# EAGLE board daughterboard (EAGLE 4.13)
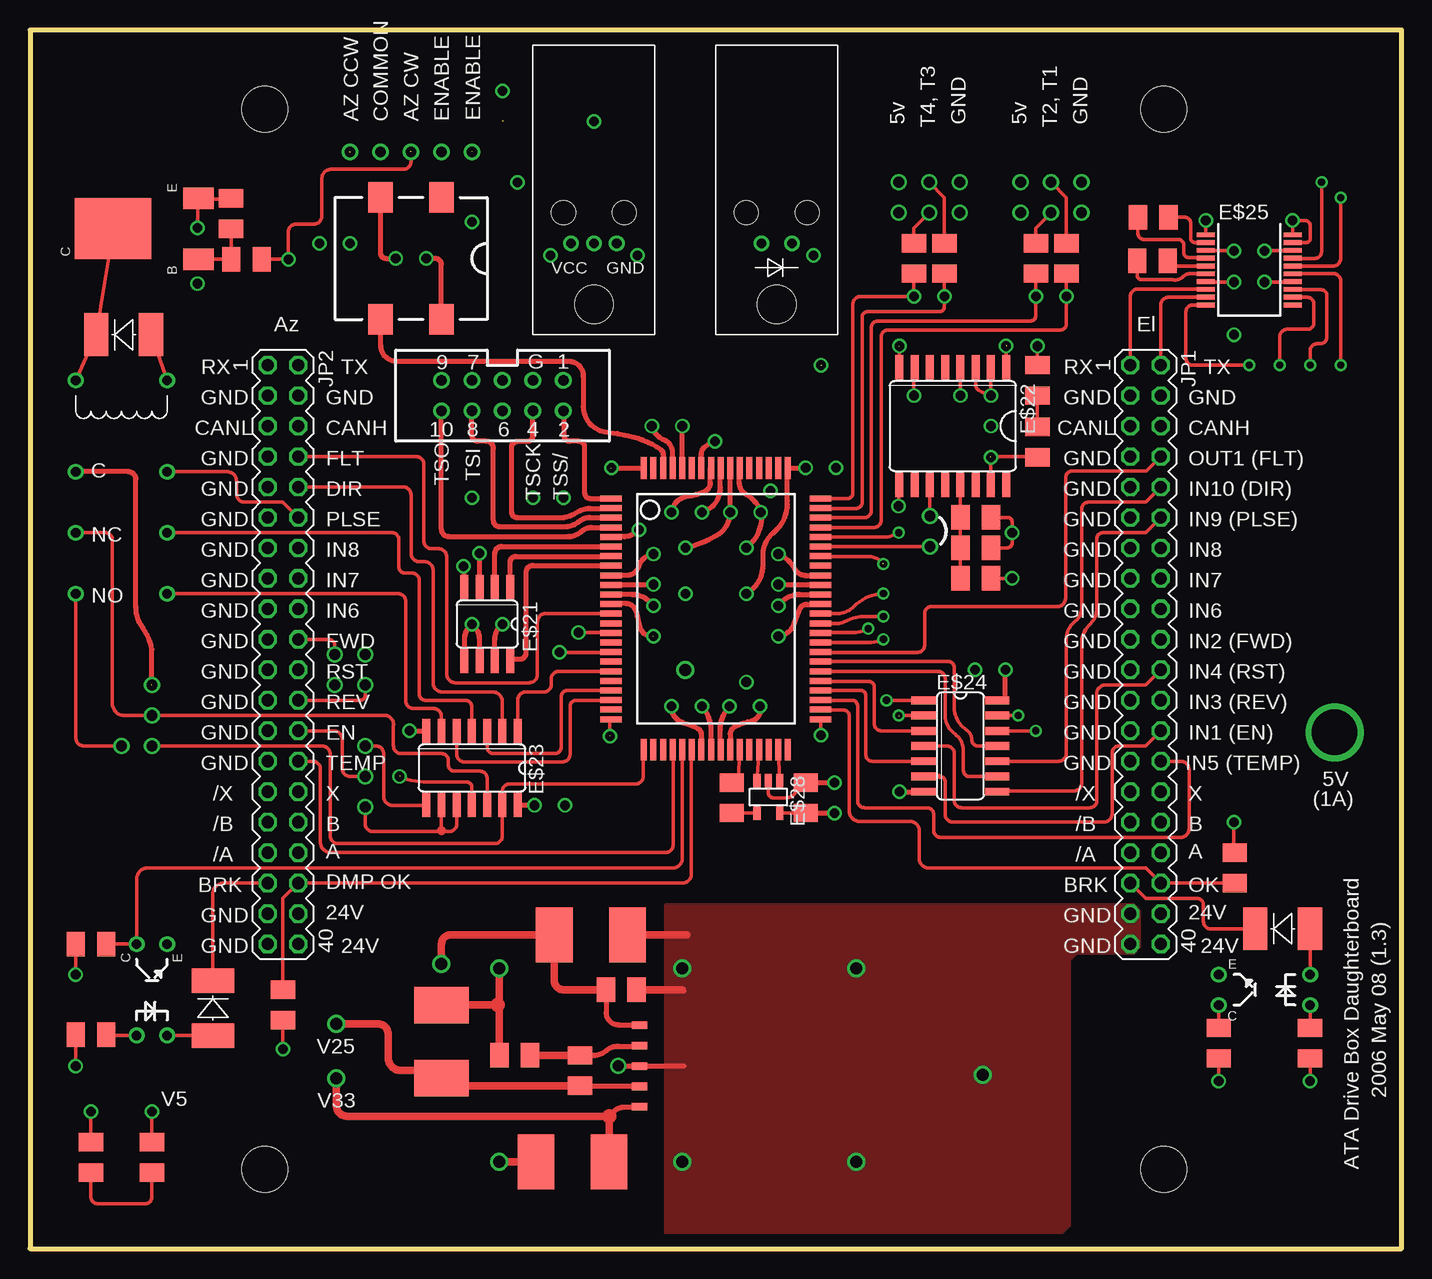
[diagram p0: board, top side]
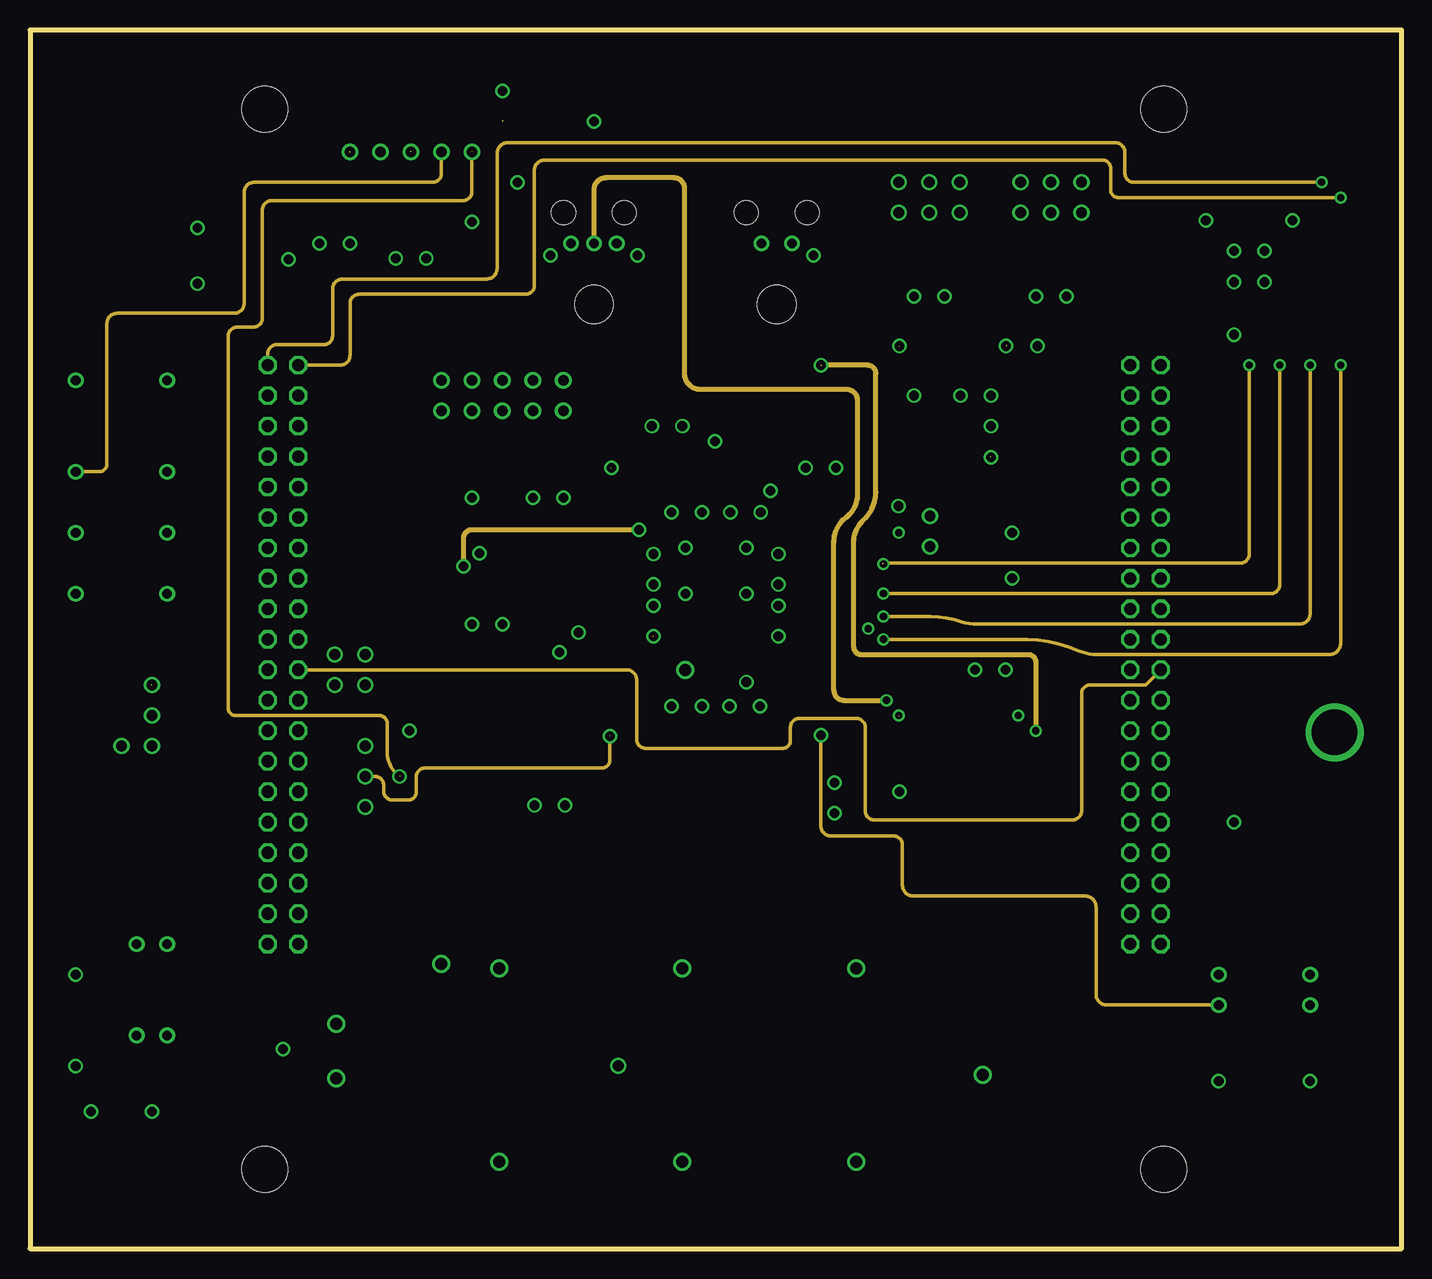
[diagram p1: board, inner layer Route2]
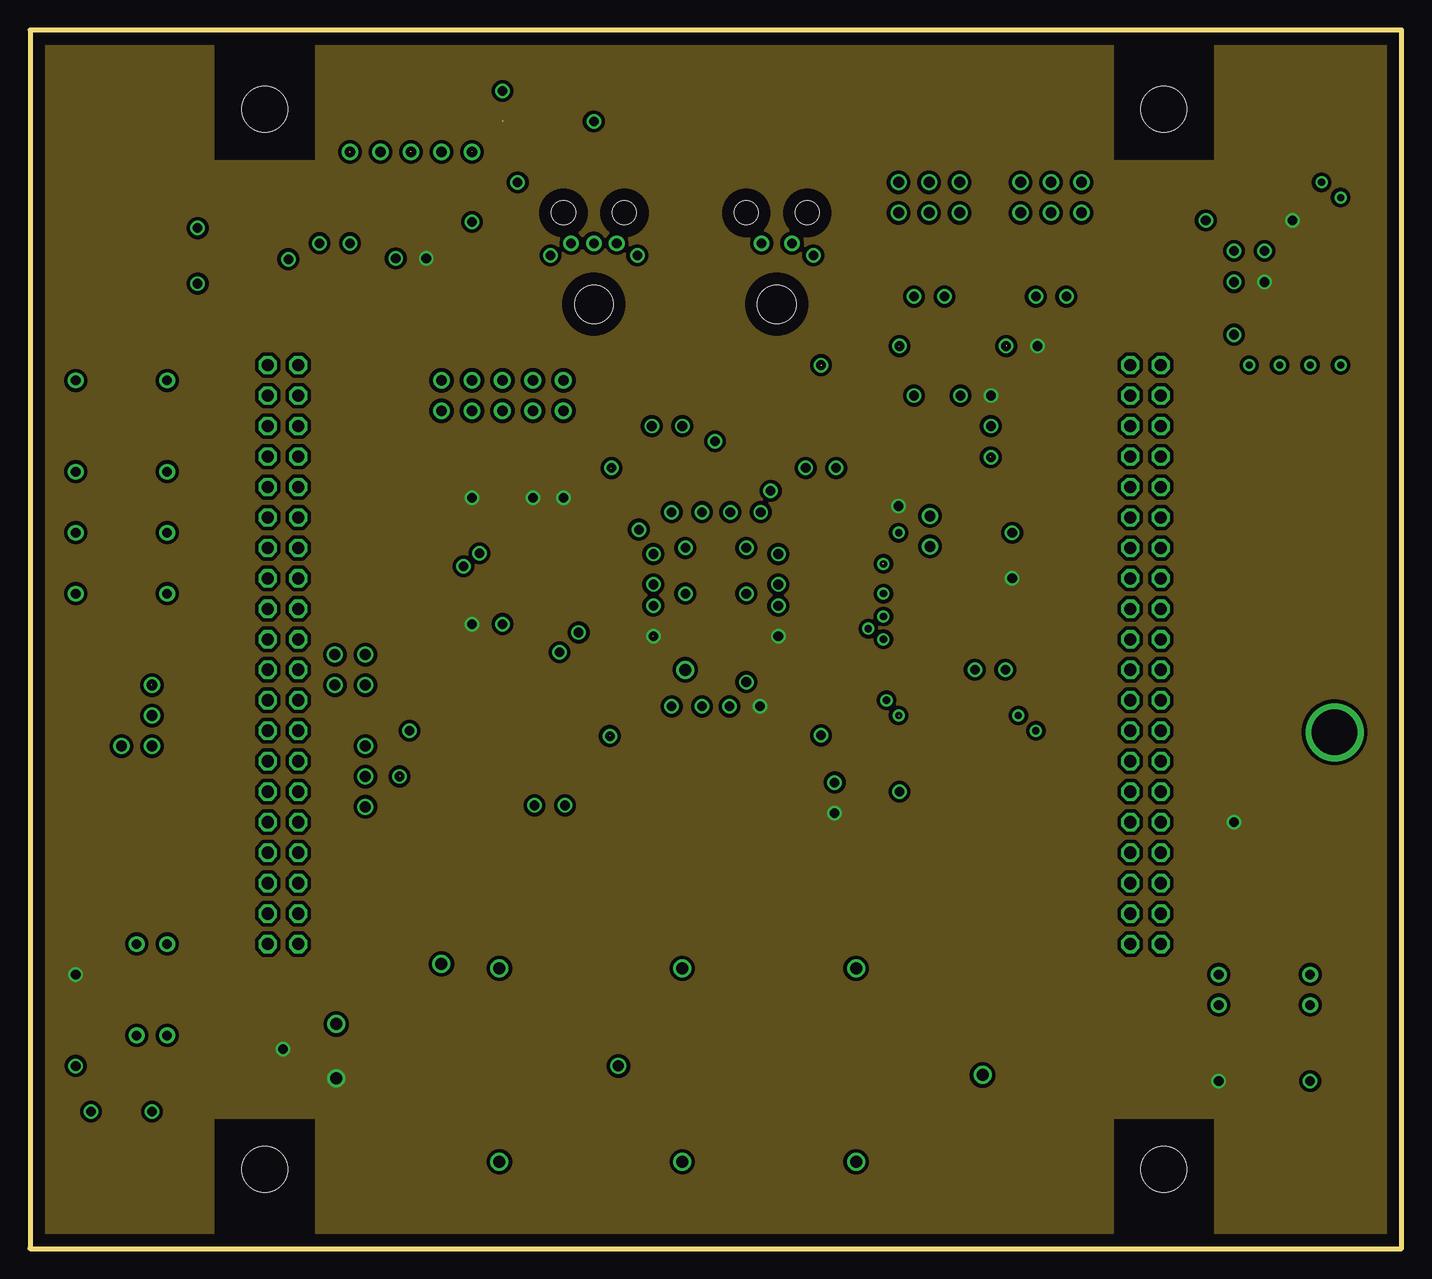
[diagram p2: board, inner layer Route3]
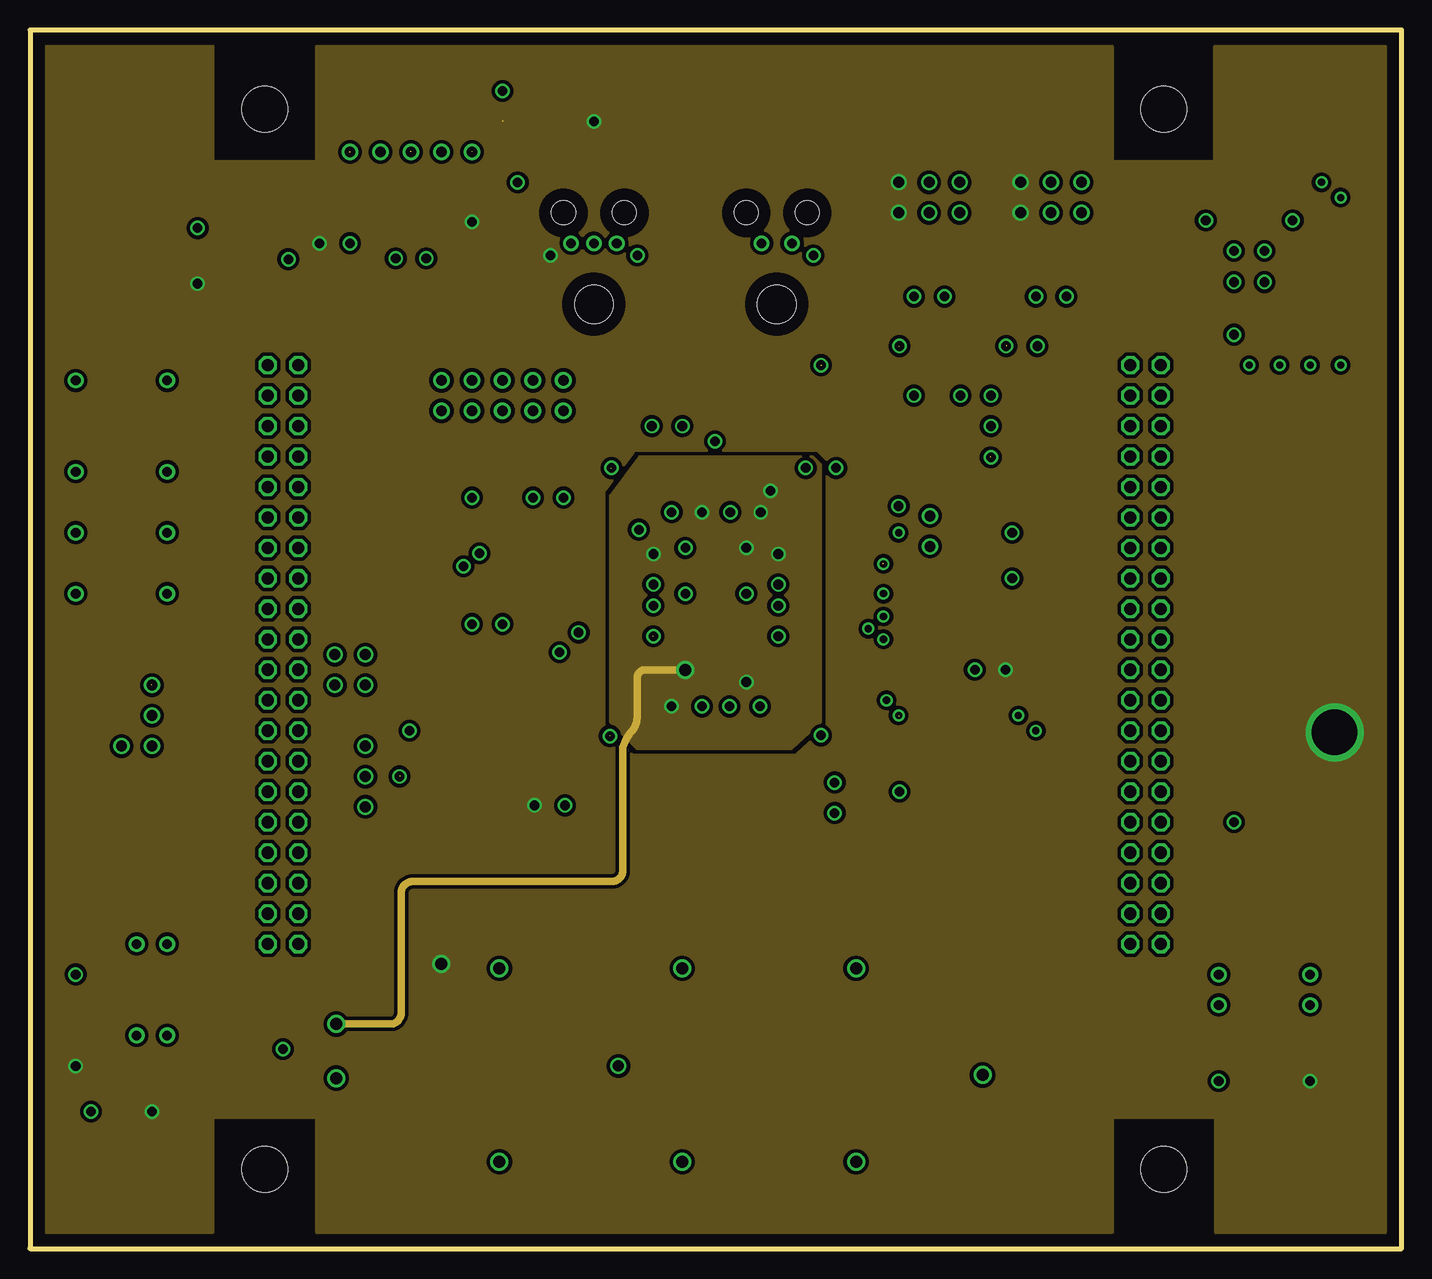
[diagram p3: board, inner layer Route14]
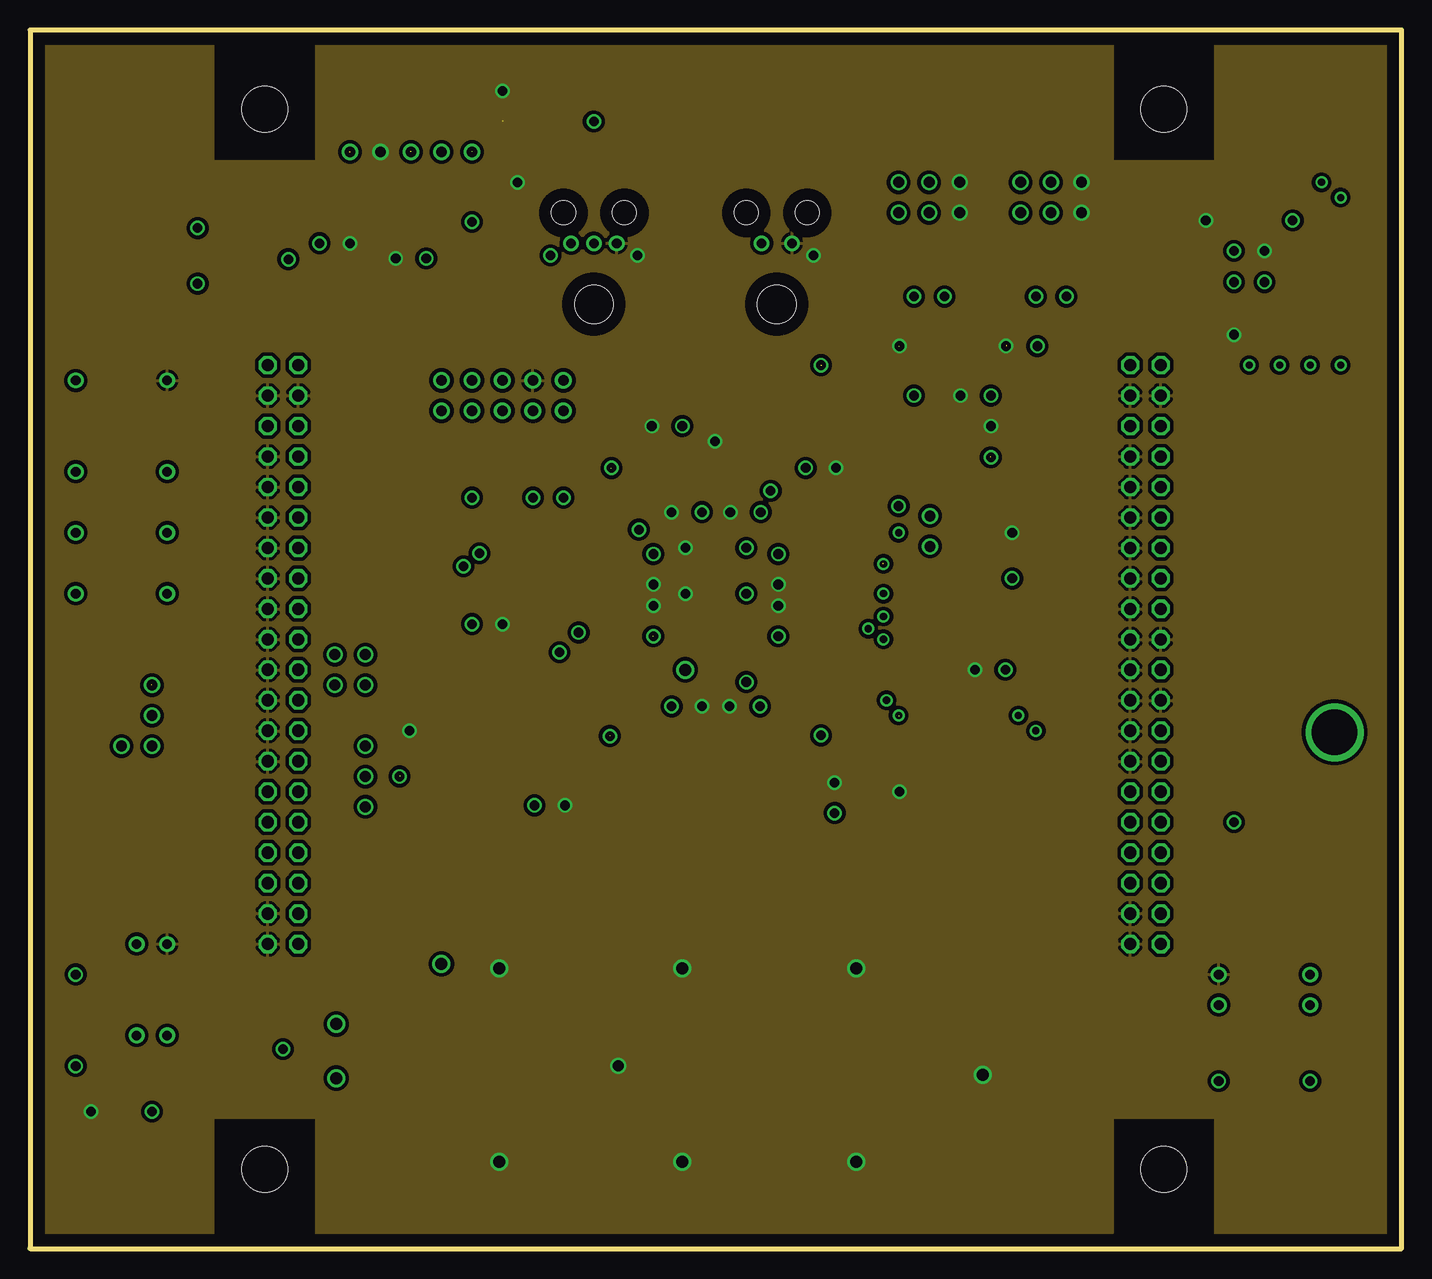
[diagram p4: board, inner layer Route15]
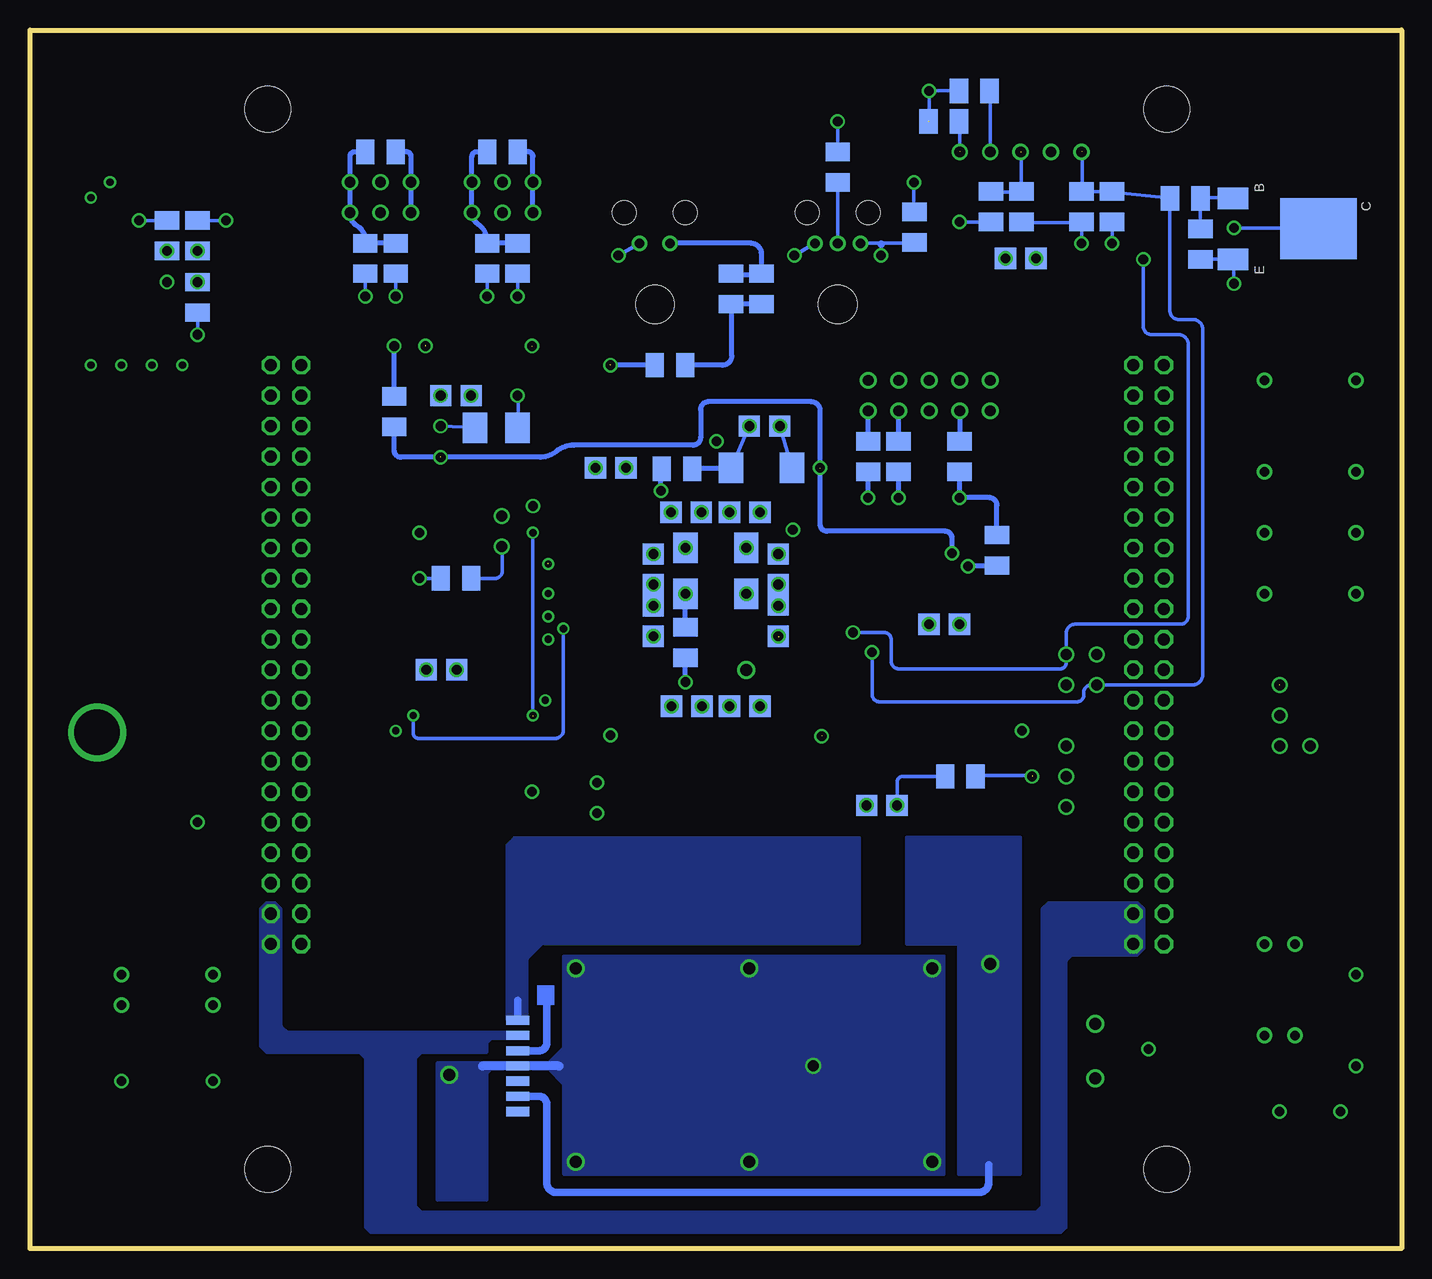
[diagram p5: board, bottom side, seen from below]

Size 114.3 x 101.6 mm. Coordinates in mm from the lower left corner, seen from the top.
Outline: 0,0 114.3,0 114.3,101.6 0,101.6 0,0
Copper layers (1*2+3*14+15*16): Top 0.035mm / dielectric 1.5mm / Route2 0.035mm / dielectric 0.15mm / Route3 0.035mm / dielectric 0.2mm / Route14 0.035mm / dielectric 0.15mm / Route15 0.035mm / dielectric 0.2mm / Bottom 0.035mm
Design rules "default": minimum track width 10mil, minimum drill 24mil, track to track 8mil, track to pad 8mil, pad to pad 8mil, via to via 8mil, smd to smd 8mil, copper to edge 40mil, drill to drill 8mil, minimum pad ring 10mil, minimum via ring 8mil, stop-mask expansion 4mil, vias tented up to drill 0mil, thermal gap 10mil
Holes 3.81 mm at 19.56,6.6 94.49,6.6 19.56,95 94.49,95

## Footprints (pad centres in the part's own frame; a part is rotated, then mirrored left to right if it is on the bottom)
SMD0805 = smd 2.032 x 1.524: P$1 0,1.27; P$2 0,-1.27
SMALLTANTALUM = smd 4.572 x 3.048: P$1 0,3.048; P$2 0,-3.048
IFD96 = drill 0.8 round: P$1 0,0; P$2 -1.905,0; P$3 1.905,0 | hole 2: -2.54,2.54; 2.54,2.54 | hole 3.2: 0,-5.08
IFE96 = drill 0.8 round: P$1 -1.27,0; P$2 1.27,0 | hole 3.2: 0,-5.08 | hole 2: -2.54,2.54; 2.54,2.54
80PQFP = smd 0.5 x 1.8: 1 -9.2,-8.735; 2 -8.4,-8.735; 3 -7.6,-8.735; 4 -6.8,-8.735; 5 -6,-8.735; 6 -5.2,-8.735; 7 -4.4,-8.735; 8 -3.6,-8.735; 9 -2.8,-8.735; 10 -2,-8.735; 11 -1.2,-8.735; 12 -0.4,-8.735; 13 0.4,-8.735; 14 1.2,-8.735; 15 2,-8.735; 16 2.8,-8.735; 17 3.6,-8.735; 18 4.4,-8.735; 19 5.2,-8.735; 20 6,-8.735; 21 6.8,-8.735; 22 7.6,-8.735; 23 8.4,-8.735; 24 9.2,-8.735; 41 9.2,8.735; 42 8.4,8.735; 43 7.6,8.735; 44 6.8,8.735; 45 6,8.735; 46 5.2,8.735; 47 4.4,8.735; 48 3.6,8.735; 49 2.8,8.735; 50 2,8.735; 51 1.2,8.735; 52 0.4,8.735; 53 -0.4,8.735; 54 -1.2,8.735; 55 -2,8.735; 56 -2.8,8.735; 57 -3.6,8.735; 58 -4.4,8.735; 59 -5.2,8.735; 60 -6,8.735; 61 -6.8,8.735; 62 -7.6,8.735; 63 -8.4,8.735; 64 -9.2,8.735 | smd 1.8 x 0.5: 25 11.735,-5.2; 26 11.735,-4.4; 27 11.735,-3.6; 28 11.735,-2.8; 29 11.735,-2; 30 11.735,-1.2; 31 11.735,-6; 32 11.735,-0.4; 33 11.735,0.4; 34 11.735,1.2; 35 11.735,2; 36 11.735,2.8; 37 11.735,3.6; 38 11.735,4.4; 39 11.735,5.2; 40 11.735,6; 65 -11.735,6; 66 -11.735,5.2; 67 -11.735,4.4; 68 -11.735,3.6; 69 -11.735,2.8; 70 -11.735,2; 71 -11.735,1.2; 72 -11.735,0.4; 73 -11.735,-0.4; 74 -11.735,-1.2; 75 -11.735,-2; 76 -11.735,-2.8; 77 -11.735,-3.6; 78 -11.735,-4.4; 79 -11.735,-5.2; 80 -11.735,-6
SPAK-5L = smd 0.635 x 1.27: P$1 0,0; P$2 -1.702,0; P$3 1.702,0; P$4 -3.404,0; P$5 3.404,0
SQUAREPAD100X80 = smd 2.54 x 2.032: P$1 0,0
SMTOSCILLATOR = smd 2.54 x 2.032: P$1 -5.08,-2.54; P$2 -5.08,2.54; P$3 5.08,2.54; P$4 5.08,-2.54
JTAG2X5 = drill 0.9 round: P$1 0,1.27; P$2 0,-1.27; P$3 -2.54,-1.27; P$4 -2.54,1.27; P$5 -5.08,1.27; P$6 -5.08,-1.27; P$7 2.54,-1.27; P$8 2.54,1.27; P$9 5.08,1.27; P$10 5.08,-1.27
SO08 = smd 0.66 x 2.032: 1 -1.905,-3.073; 2 -0.635,-3.073; 3 0.635,-3.073; 4 1.905,-3.073; 5 1.905,3.073; 6 0.635,3.073; 7 -0.635,3.073; 8 -1.905,3.073
SO16L = smd 0.66 x 2.032: 1 -4.445,-4.902; 2 -3.175,-4.902; 3 -1.905,-4.902; 4 -0.635,-4.902; 5 0.635,-4.902; 6 1.905,-4.902; 7 3.175,-4.902; 8 4.445,-4.902; 9 4.445,4.902; 10 3.175,4.902; 11 1.905,4.902; 12 0.635,4.902; 13 -0.635,4.902; 14 -1.905,4.902; 15 -3.175,4.902; 16 -4.445,4.902
SO14 = smd 0.66 x 2.032: 1 -3.81,-3.073; 2 -2.54,-3.073; 3 -1.27,-3.073; 4 0,-3.073; 5 1.27,-3.073; 6 2.54,-3.073; 7 3.81,-3.073; 8 3.81,3.073; 9 2.54,3.073; 10 1.27,3.073; 11 0,3.073; 12 -1.27,3.073; 13 -2.54,3.073; 14 -3.81,3.073
SSOP20 = smd 0.4 x 1.5: 1 -2.925,-3.625; 2 -2.275,-3.625; 3 -1.625,-3.625; 4 -0.975,-3.625; 5 -0.325,-3.625; 6 0.325,-3.625; 7 0.975,-3.625; 8 1.625,-3.625; 9 2.275,-3.625; 10 2.925,-3.625; 11 2.925,3.625; 12 2.275,3.625; 13 1.625,3.625; 14 0.975,3.625; 15 0.325,3.625; 16 -0.325,3.625; 17 -0.975,3.625; 18 -1.625,3.625; 19 -2.275,3.625; 20 -2.925,3.625
OPTOISOLATOR4PIN = drill 0.8 round: P$1 -3.81,1.27; P$2 -3.81,-1.27; P$3 3.81,1.27; P$4 3.81,-1.27
SOT23-5 = smd 0.6 x 1.2: 1 -0.95,-1.306; 2 0,-1.306; 3 0.95,-1.306; 4 0.95,1.306; 5 -0.95,1.306
SILICONDIODESMA = smd 3.556 x 2.032: P$1 0,2.286; P$2 0,-2.286
SMD1206 = smd 2.54 x 2.032: P$1 0,1.778; P$2 0,-1.778
DPAK = smd 5.08 x 6.35: P$1 0,4.572 | smd 1.778 x 2.54: P$2 -2.54,-2.54; P$3 2.54,-2.54
PCB5VRELAY = drill 0.8 round: P$1 -3.81,0; P$2 3.81,0; P$3 -3.81,7.62; P$4 3.81,7.62; P$5 -3.81,-5.08; P$6 3.81,-5.08; P$7 -3.81,-10.16; P$8 3.81,-10.16
BYPASSPAD = smd 1.778 x 1.778: P$2 0,0
MA20-2 = drill 1.016 octagon: 1 -24.13,-1.27; 2 -24.13,1.27; 3 -21.59,-1.27; 4 -21.59,1.27; 5 -19.05,-1.27; 6 -19.05,1.27; 7 -16.51,-1.27; 8 -16.51,1.27; 9 -13.97,-1.27; 10 -13.97,1.27; 11 -11.43,-1.27; 12 -11.43,1.27; 13 -8.89,-1.27; 14 -8.89,1.27; 15 -6.35,-1.27; 16 -6.35,1.27; 17 -3.81,-1.27; 18 -3.81,1.27; 19 -1.27,-1.27; 20 -1.27,1.27; 21 1.27,-1.27; 22 1.27,1.27; 23 3.81,-1.27; 24 3.81,1.27; 25 6.35,-1.27; 26 6.35,1.27; 27 8.89,-1.27; 28 8.89,1.27; 29 11.43,-1.27; 30 11.43,1.27; 31 13.97,-1.27; 32 13.97,1.27; 33 16.51,-1.27; 34 16.51,1.27; 35 19.05,-1.27; 36 19.05,1.27; 37 21.59,-1.27; 38 21.59,1.27; 39 24.13,-1.27; 40 24.13,1.27
TO263-7 = smd 0.762 x 1.905: P$1 0,0; P$2 -1.27,0; P$3 -2.54,0; P$4 -3.81,0; P$5 1.27,0; P$6 2.54,0; P$7 3.81,0

## Placement (x,y rotation side)
E$1  [SMD0805]  49.28,21.59 90 top
E$2  [SMALLTANTALUM]  46.74,26.16 90 top
E$3  [SMD0805]  45.85,14.86 0 top
E$4  [SMD0805]  40.39,16.13 270 top
E$5  [IFD96]  46.99,83.82 0 top
E$6  [IFE96]  62.23,83.82 0 top
E$7  [80PQFP]  57.15,53.34 270 top
E$8  [SPAK-5L]  50.8,15.24 90 top
E$9  [SMALLTANTALUM]  34.29,17.27 0 top
E$10  [SMALLTANTALUM]  45.21,7.24 90 top
E$11  [SQUAREPAD100X80]  54.61,58.42 270 bottom
E$12  [SQUAREPAD100X80]  59.69,58.42 270 bottom
E$13  [SQUAREPAD100X80]  54.61,54.61 270 bottom
E$14  [SQUAREPAD100X80]  59.69,54.61 270 bottom
E$15  [SMD0805]  59.69,50.55 0 bottom
E$16  [SQUAREPAD100X80]  50.8,65.09 270 bottom
E$17  [SQUAREPAD100X80]  55.88,65.09 270 bottom
E$18  [SMD0805]  60.39,65.02 90 bottom
E$19  [SMTOSCILLATOR]  31.75,82.55 270 top
E$20  [JTAG2X5]  39.37,71.12 180 top
E$21  [SO08]  38.1,52.07 180 top
E$22  [SO16L]  76.9,68.58 180 top
E$23  [SO14]  36.83,40.07 180 top
E$24  [SO14]  77.53,41.91 270 top
E$25  [SSOP20]  101.6,81.6 270 top
E$26  [OPTOISOLATOR4PIN]  10.16,21.59 90 top
E$27  [OPTOISOLATOR4PIN]  102.87,21.59 180 top
E$28  [SOT23-5]  61.53,37.66 180 top
E$29  [SILICONDIODESMA]  15.24,20.07 180 top
E$30  [SMD0805]  5.08,17.84 90 top
E$31  [SMD0805]  5.08,25.4 90 top
E$32  [SILICONDIODESMA]  104.39,26.67 270 top
E$33  [SMD0805]  106.68,17.14 180 top
E$34  [SMD0805]  99.06,17.14 180 top
E$35  [SMD0805]  44.45,66.04 180 bottom
E$36  [SMD0805]  41.91,66.04 180 bottom
E$37  [SMD0805]  36.83,66.04 180 bottom
E$38  [SMD0805]  74.93,91.44 270 bottom
E$39  [SMD0805]  85.09,91.44 270 bottom
E$40  [SMD0805]  73.66,82.55 0 top
E$41  [SMD0805]  76.2,82.55 0 top
E$42  [SMD0805]  83.82,82.55 0 top
E$43  [SMD0805]  86.36,82.55 0 top
E$44  [SMD0805]  86.36,82.55 0 bottom
E$45  [SMD0805]  83.82,82.55 0 bottom
E$46  [SMD0805]  76.2,82.55 0 bottom
E$47  [SMD0805]  73.66,82.55 0 bottom
E$48  [SMD0805]  78.8,60.96 90 top
E$49  [SMD0805]  78.8,58.42 90 top
E$50  [SMD0805]  78.8,55.88 90 top
E$51  [SMD0805]  78.8,55.88 270 bottom
E$52  [SMD0805]  83.95,67.25 0 top
E$53  [SMD0805]  83.95,72.39 0 top
E$54  [SMD1206]  75.44,68.45 90 bottom
E$55  [SMD0805]  53.34,80.01 0 bottom
E$56  [SMD0805]  55.88,80.01 180 bottom
E$57  [SMD0805]  60.96,73.66 90 bottom
E$58  [SMD0805]  100.39,31.75 0 top
E$59  [SMD0805]  64.64,37.59 0 top
E$60  [SMD0805]  58.48,37.59 0 top
E$61  [SMD0805]  21.08,20.32 0 top
E$62  [SMD0805]  93.54,82.36 90 top
E$63  [SMD0805]  93.6,85.98 270 top
E$64  [SMD0805]  100.33,84.45 0 bottom
E$65  [SMD0805]  100.33,79.31 0 bottom
E$66  [SMD0805]  102.87,84.45 0 bottom
E$67  [SMD0805]  5.08,7.62 0 top
E$68  [SMD0805]  10.16,7.62 0 top
E$69  [DPAK]  11.49,85.03 90 top
E$70  [DPAK]  11.49,85.03 270 bottom
E$71  [SMD0805]  26.67,86.87 0 bottom
E$72  [SMD0805]  31.69,86.87 0 bottom
E$73  [SMD0805]  24.13,86.87 0 bottom
E$74  [SMD0805]  34.23,86.87 0 bottom
E$75  [SMD0805]  18.03,87.57 90 bottom
E$76  [SMD0805]  18.03,82.49 90 top
E$77  [SMD0805]  16.76,83.76 0 bottom
E$78  [SMD0805]  16.76,86.3 0 top
E$79  [PCB5VRELAY]  7.62,64.77 0 top
E$80  [SILICONDIODESMA]  7.81,76.2 270 top
E$81  [SMD0805]  38.16,93.98 90 bottom
E$82  [SMD0805]  36.77,39.37 90 bottom
E$83  [SMD0805]  35.62,96.52 90 bottom
E$84  [BYPASSPAD]  30.48,82.55 0 bottom
E$85  [BYPASSPAD]  33.02,82.55 0 bottom
E$86  [SMD0805]  46.99,90.17 0 bottom
E$87  [SMD0805]  40.58,85.15 180 bottom
E$88  [BYPASSPAD]  36.83,52.07 270 bottom
E$89  [BYPASSPAD]  39.37,52.07 270 bottom
E$90  [BYPASSPAD]  42.04,36.96 0 bottom
E$91  [BYPASSPAD]  44.58,36.96 0 bottom
E$92  [BYPASSPAD]  78.74,48.26 0 bottom
E$93  [BYPASSPAD]  81.28,48.26 0 bottom
E$94  [BYPASSPAD]  77.53,71.12 0 bottom
E$95  [BYPASSPAD]  80.07,71.12 0 bottom
E$96  [BYPASSPAD]  51.94,57.91 0 bottom
E$97  [BYPASSPAD]  51.94,55.37 0 bottom
E$98  [BYPASSPAD]  51.94,53.66 0 bottom
E$99  [BYPASSPAD]  51.94,51.05 0 bottom
E$100  [BYPASSPAD]  53.47,45.21 0 bottom
E$101  [BYPASSPAD]  56.01,45.21 0 bottom
E$102  [BYPASSPAD]  58.29,45.21 0 bottom
E$103  [BYPASSPAD]  60.83,45.21 0 bottom
E$104  [BYPASSPAD]  62.36,51.05 0 bottom
E$105  [BYPASSPAD]  62.36,53.59 0 bottom
E$106  [BYPASSPAD]  62.36,55.37 0 bottom
E$107  [BYPASSPAD]  62.36,57.91 0 bottom
E$108  [BYPASSPAD]  64.64,65.09 0 bottom
E$109  [BYPASSPAD]  67.18,65.09 0 bottom
E$110  [BYPASSPAD]  53.47,61.4 0 bottom
E$111  [BYPASSPAD]  56.01,61.4 0 bottom
E$112  [BYPASSPAD]  58.36,61.4 0 bottom
E$113  [BYPASSPAD]  60.9,61.4 0 bottom
E$114  [BYPASSPAD]  51.82,68.58 90 bottom
E$115  [BYPASSPAD]  54.36,68.58 90 bottom
E$116  [SMD0805]  83.95,69.79 0 bottom
E$117  [SMD0805]  33.72,58.23 0 bottom
JP1  [MA20-2]  92.96,49.53 270 top
JP2  [MA20-2]  21.08,49.53 270 top
LM2676  [TO263-7]  73.66,15.24 270 bottom

## Library data of the parts
E$1-E$6 E$8-E$20 E$26 E$27 E$29-E$117 LM2676 = rfa
E$7 = ubicom_v2
E$21-E$25 = maxim
E$28 = burr-brown
JP1 JP2 = con-lstb

## Nets
GND: E$1.P$2 E$2.P$2 E$4.P$2 E$5.P$3 E$6.P$2 E$8.P$1 E$9.P$1 E$10.P$1 E$20.P$3 E$26.P$4 E$27.P$4 E$38.P$2 E$44.P$1 E$45.P$1 E$46.P$1 E$47.P$1 E$48.P$2 E$49.P$2 E$54.P$1 E$59.P$1 E$67.P$1 E$71.P$2 E$79.P$4 E$80.P$1 E$81.P$1 E$83.P$1 JP1.3 JP1.4 JP1.7 JP1.9 JP1.11 JP1.13 JP1.15 JP1.17 JP1.19 JP1.20 JP1.21 JP1.23 JP1.24 JP1.25 JP1.27 JP1.37 JP1.39 JP2.3 JP2.4 JP2.7 JP2.9 JP2.11 JP2.13 JP2.15 JP2.17 JP2.19 JP2.21 JP2.23 JP2.25 JP2.27 JP2.37 JP2.39 LM2676.P$1
S$2: E$83.P$2
S$4: E$79.P$3 E$80.P$2
S$5: E$79.P$1
S$7: LM2676.P$2
S$8: E$3.P$1
S$9: E$40.P$2
S$10: E$40.P$1
S$11: E$42.P$2
S$12: E$17.P$1
S$13: E$41.P$1
S$14: E$79.P$7
S$16: E$43.P$1
S$19: E$42.P$1
S$20: E$48.P$1 E$49.P$1 E$50.P$1
S$21: E$3.P$2
S$35: E$15.P$1
S$46: E$5.P$1 E$86.P$2
S$53: E$20.P$4
S$54: E$20.P$5 E$35.P$2
S$57: E$20.P$8 E$37.P$2
S$58: E$20.P$9
S$61: E$116.P$2
S$64: E$41.P$2
S$67: E$43.P$2
S$75: E$51.P$1
S$80: E$53.P$2
S$83: JP1.8
S$87: E$67.P$2 E$68.P$2
S$88: JP1.12
S$89: JP2.28
S$90: JP1.10
S$92: JP1.26
S$93: JP1.22 JP2.22
S$100: E$57.P$1
S$102: JP1.28
S$104: E$6.P$1 E$55.P$1
S$105: E$56.P$2
S$106: E$55.P$2
S$107: E$57.P$2
S$109: JP2.36
S$110: E$58.P$2 JP1.36
S$113: E$32.P$2 JP1.35
S$114: E$27.P$2 E$32.P$1
S$115: E$27.P$1 E$33.P$2
S$116: E$29.P$2 JP2.35
S$117: E$27.P$3
S$123: E$60.P$2
S$125: E$26.P$2 E$29.P$1
S$126: E$26.P$1
S$129: JP2.8
S$130: E$26.P$3
S$131: JP1.1
S$132: JP1.2
S$139: E$63.P$1
S$141: E$62.P$1
S$146: E$73.P$1
S$150: JP2.2
S$152: JP2.1
S$157: E$76.P$1
S$161: E$79.P$5
S$162: E$75.P$1
S$167: JP2.10
S$172: E$79.P$6
S$173: E$79.P$8
S$174: E$79.P$2 JP2.12
S$180: JP2.26
SWOUT: LM2676.P$4
V5: E$1.P$1 E$2.P$1 E$33.P$1 E$38.P$1 E$39.P$1 E$68.P$1 E$74.P$2 E$86.P$1 LM2676.P$6
V24: JP1.38 JP1.40 JP2.38 JP2.40 LM2676.P$3
V25: E$15.P$2
V33: E$10.P$2 E$19.P$3 E$31.P$1 E$34.P$1 E$35.P$1 E$37.P$1 E$50.P$2 E$51.P$2 E$53.P$1 E$59.P$2 E$116.P$1

## Tracks (layer width: path | path; a pad name or v marks a point on that pad's centre or on a via)
GND  (via drill 0.8, 0.9, 1)  (3 unrouted)
  Top 0.305: E$67.P$1 v5.08,11.43 | E$79.P$4 E$80.P$1 | E$48.P$2 81.47,60.96 arc-90 81.85,60.58 v81.85,59.69 81.85,58.86 arc-90 81.41,58.42 E$49.P$2 | 72.45,73.41 72.45,75.18 | v77.53,71.12 77.53,73.41 | 81.34,73.41 81.34,75.31 | v97.98,85.72 97.98,84.52 | v102.87,83.19 105.22,83.19
  Top 0.406: 54.48,15.24 E$8.P$1 v49.02,15.24 | 54.36,21.59 arc-90 54.48,21.46 | v31.62,43.18 32.96,43.18 | v39.37,52.07 arc53 38.73,50.8 38.73,48.96 | v56.01,45.21 arc-41 56.77,43.18 56.77,41.66 | v58.29,45.21 arc44 57.53,43.31 57.53,41.91 | E$59.P$1 v67.06,38.86 | 48.39,55.37 v51.94,55.37 | 48.39,54.55 50.16,54.55 arc-56 v51.94,53.59 | v72.45,38.1 74.49,38.1 | 29.21,87.69 29.21,83 arc90 29.65,82.55 v30.48,82.55 | 58.36,65.09 v58.36,61.4 arc-59 57.28,59.5 arc-18 v54.61,58.42 | 65.91,54.55 64.14,54.55 arc56 v62.36,53.59 | v62.36,55.37 65.91,55.37 | 56.71,65.09 56.71,63.88 arc-67 56.2,63.12 arc-15 54.8,62.74 arc74 v53.47,61.4 | 53.53,65.09 53.53,66.42 arc69 52.83,67.44 arc-55 v51.82,68.58 | v57.09,67.31 arc17 56.26,66.86 arc53 55.94,66.23 55.94,65.09
  Top 0.61: v39.12,7.24 E$10.P$1 | 39.12,20.32 v39.12,23.37 | 39.12,20.32 E$4.P$2 | E$9.P$1 39.12,20.32 | E$1.P$2 54.36,21.59 | E$2.P$2 54.74,26.16
  Bottom 0.305: 26.67,85.53 v26.67,83.82 | 26.67,85.53 31.69,85.53 | E$71.P$2 26.67,85.53 | 50.8,65.02 v51.82,68.58 | 40.64,86.36 v40.64,88.9 | v50.61,82.8 E$5.P$3 | E$83.P$1 v39.37,96.52 39.37,93.98 | E$54.P$1 v80.07,68.58 | v65.28,82.8 E$6.P$2 | v100.33,76.2 100.33,78.11 | 100.33,85.66 arc90 100.27,85.72 v97.98,85.72
  Bottom 0.406: E$38.P$2 77.09,91.44 arc-90 77.47,91.06 v77.47,88.9 v77.47,86.36 arc-56 76.96,85.41 arc61 E$46.P$1 E$47.P$1 | 86.36,91.5 arc90 86.42,91.44 87.25,91.44 arc-90 87.63,91.06 v87.63,88.9 v87.63,86.36 arc-65 87.06,85.28 arc70 E$44.P$1 E$45.P$1
  Bottom 0.762: 76.58,15.24 LM2676.P$1 70.23,15.24
  other vias: 54.36,7.24 68.83,7.24 54.36,23.37 44.58,36.96 68.83,23.37 79.38,14.48 54.61,54.61 29.21,91.44 78.74,48.26 67.18,65.09 72.45,75.25 81.34,75.25
  pour Bottom (isolate 0.406): 38.1,24.38 69.85,24.38 69.85,16.76 71.12,15.49 80.39,15.49 80.39,4.06 76.2,4.06 76.2,14.48 76.2,14.61 75.82,14.99 71.12,14.99 69.85,13.72 69.85,6.22 38.1,6.22
  pour Top (isolate 0.406, no thermals): 91.95,28.7 92.46,28.19 92.46,25.15 91.95,24.64 87.25,24.64 86.61,24 86.61,1.91 85.98,1.27 52.96,1.27 52.96,28.7
  pour Route15 (isolate 0.305): 1.27,100.33 15.24,100.33 15.24,90.68 23.88,90.68 23.88,100.33 90.17,100.33 90.17,90.68 98.81,90.68 98.81,100.33 113.03,100.33 113.03,1.27 98.81,1.27 98.81,10.92 90.17,10.92 90.17,1.27 23.88,1.27 23.88,10.92 15.24,10.92 15.24,1.27 1.27,1.27
S$1  (via drill 0.8, 0.9)  (2 unrouted)
  Top 0.305: 36.83,36.96 36.83,38.42 arc90 36.32,38.92 32.77,38.92 arc-25 v30.8,39.37
  Route2 0.305: 36.83,91.5 36.83,88.14 arc-90 36.07,87.38 20.13,87.38 arc90 19.37,86.61 19.37,77.6 arc-90 18.61,76.83 17.27,76.83 arc90 16.51,76.07 16.51,45.09 arc90 17.14,44.45 29.08,44.45 arc-90 29.78,43.75 29.78,41.34 arc55 v30.8,39.37
  Bottom 0.305: v36.83,91.44 36.83,93.98 | 30.8,39.43 35.56,39.43
S$2  (via drill 0.9)
  Route2 0.305: v34.29,91.44 34.29,89.66 arc-90 33.53,88.9 18.67,88.9 arc90 17.84,88.08 17.84,78.8 arc-90 17.02,77.98
  Bottom 0.305: E$83.P$2 arc90 34.29,96.46 v34.29,91.44
S$3  (via drill 0.8)
  Top 0.305: v13.97,85.09 13.97,87.5
  Bottom 0.305: 7.18,85.09 v13.97,85.09
S$4
  Top 0.305: E$79.P$3 E$80.P$2
S$5  (via drill 0.9)  (1 unrouted)
  Top 0.406: E$79.P$1 8.19,64.77 arc-90 8.83,64.14 8.83,53.53 arc36 9.4,51.75 arc-25 10.16,49.97 10.16,47.05
  Route2 0.305: 17.08,77.98 7.24,77.98 arc90 6.41,77.15 6.41,65.41 arc-90 5.78,64.77 E$79.P$1
  other vias: 10.16,46.99
S$6
  Top 0.406: 50.8,13.59 45.97,13.59 arc90 45.85,13.46
S$7
  Bottom 0.61: LM2676.P$2 71.88,16.51 arc-90 71.25,17.14 71.25,21.21
S$8
  Top 0.406: 50.8,16.89 49.02,16.89 arc41 48.01,16.51 arc-45 46.86,16.13 E$3.P$1
  Top 0.61: 41.53,16.13 E$3.P$1
S$9  (via drill 0.8)
  Top 0.305: 65.85,62.55 68.14,62.55 arc90 68.58,62.99 68.58,78.74 arc-90 69.22,79.38 v73.66,79.38 E$40.P$2
  Bottom 0.305: v73.66,79.38 E$40.P$2
S$10  (via drill 0.9)
  Top 0.305: v74.93,86.36 73.66,85.09 E$40.P$1
S$11  (via drill 0.8)
  Top 0.305: 65.91,60.96 69.53,60.96 arc90 70.1,61.47 70.1,76.77 arc-90 70.67,77.34 83.38,77.34 arc90 83.82,77.79 v83.82,79.38 E$42.P$2
  Bottom 0.305: v83.82,79.38 E$42.P$2
S$12  (via drill 0.8)
  Top 0.406: 54.36,65.09 v54.36,68.58
  Bottom 0.305: v54.36,68.58 E$17.P$1
  Bottom 0.406: 59.18,65.02 55.88,65.02 E$17.P$1
S$13  (via drill 0.9)
  Top 0.305: v74.93,88.9 76.2,87.63 E$41.P$1
S$14  (via drill 0.9)
  Top 0.305: E$79.P$7 3.81,42.61 arc90 4.51,41.91 | 4.51,41.91 4.45,41.91 | 4.51,41.91 v7.62,41.91 7.68,41.91
S$15  (via drill 0.8)
  Top 0.406: 48.39,59.37 49.47,59.37 arc48 v50.74,59.94
  Route2 0.406: v36.13,56.9 36.13,59.24 arc-90 36.83,59.94 v50.74,59.94
  Bottom 0.406: 33.66,56.9 v36.13,56.9 36.2,56.9
S$16  (via drill 0.9)
  Top 0.305: v85.09,88.9 86.36,87.63 E$43.P$1
S$17  (via drill 0.6)  (1 unrouted)
  Top 0.305: 65.91,59.31 71.06,59.31 arc32 v72.39,59.69 | v72.39,44.45 74.42,44.45
  Bottom 0.305: 72.39,44.39 v72.39,59.69
S$18
  Top 0.406: 36.2,55.18 36.2,56.9
S$19  (via drill 0.9)
  Top 0.305: v85.09,86.36 83.82,85.09 E$42.P$1
S$20
  Top 0.305: 77.53,63.82 E$48.P$1 E$49.P$1 E$50.P$1
S$21
  Top 0.61: 34.29,13.59 E$3.P$2
S$22
  Top 0.406: 50.8,11.81 49.53,11.81 arc67 48.39,11.05
S$35  (via drill 0.8)
  Top 0.406: v64.64,65.09 63.12,65.09 63.12,62.36 arc-51 62.1,59.82 arc47 61.09,58.1 61.09,56.96 arc-60 v59.69,54.61
  Bottom 0.406: E$15.P$1 v59.69,54.61
S$46  (via drill 0.6)
  Top 0.305: v71.37,45.72 74.36,45.72
  Route2 0.406: E$5.P$1 46.99,88.27 arc-90 48.01,89.28 53.66,89.28 arc-90 54.55,88.39 54.55,72.96 arc90 55.88,71.63 68.07,71.63 arc-90 68.96,70.74 68.96,63.18 arc-60 68.01,60.96 arc53 66.99,58.93 66.99,46.55 arc90 67.82,45.72 v71.37,45.72
  Bottom 0.305: E$5.P$1 E$86.P$2
S$53
  Bottom 0.406: 41.91,67.25 E$20.P$4
S$54
  Bottom 0.406: E$35.P$2 E$20.P$5
S$55
  Top 0.406: 48.39,62.55 46.67,62.55 arc-90 46.23,62.99 46.23,66.8 arc90 45.72,67.31 44.96,67.31 arc-90 44.51,67.75 44.51,69.79
S$56
  Top 0.406: 48.39,61.72 46.67,61.72 arc33 45.59,61.4 arc-21 44.51,60.96 40.58,60.96 arc-90 40.13,61.4 40.13,66.8 arc-90 40.64,67.31 41.47,67.31 arc90 41.91,67.75 41.91,69.79
S$57
  Top 0.406: 48.39,60.96 46.67,60.96 arc39 45.78,60.64 arc-36 44.64,60.2 39.12,60.2 arc-90 38.61,60.71 38.61,66.74 arc90 38.04,67.31 37.34,67.31 arc-90 36.83,67.82 E$20.P$8
  Bottom 0.406: E$20.P$8 E$37.P$2
S$58
  Top 0.406: 48.45,60.13 46.8,60.13 arc42 45.97,59.82 arc-39 44.9,59.37 34.86,59.37 arc-90 34.29,59.94 E$20.P$9
S$59
  Top 0.406: 48.39,58.55 39.31,58.55 arc90 38.73,57.98 38.73,55.18
S$60
  Top 0.406: 48.39,57.72 40.51,57.72 arc90 40.01,57.21 40.01,55.18
S$61  (via drill 0.8)  (2 unrouted)
  Top 0.305: v80.07,65.98 80.07,63.69 | 80.07,66.04 83.82,66.04
  Top 0.406: 37.47,55.18 v37.47,57.98 | v48.45,65.09 51.12,65.09
  Bottom 0.406: v37.47,57.98 37.47,59.24 arc-90 38.04,59.82 47.88,59.82 arc90 48.45,60.39 48.45,65.02 | v48.45,65.09 48.45,69.85 arc-90 49.21,70.61 57.78,70.61 arc-90 58.42,69.91 58.42,67.63 arc90 59.05,66.99 68.96,66.99 arc-38 70.42,66.48 arc35 71.75,65.98 v80.07,65.98 83.38,65.98 arc90 83.95,66.55 E$116.P$2
S$63
  Top 0.406: 39.94,49.15 40.83,49.15 arc90 41.34,49.66 41.34,56.39 arc-90 41.91,56.96 48.39,56.96
S$64  (via drill 0.8)
  Top 0.305: E$41.P$2 v76.2,79.38 76.2,78.55 arc-90 75.75,78.11 69.79,78.11 arc90 69.34,77.66 69.34,62.23 arc-90 68.83,61.72 65.98,61.72
  Bottom 0.305: v76.2,79.38 E$41.P$2
S$65  (via drill 0.9)
  Top 0.305: v74.99,61.09 74.99,63.82
S$67  (via drill 0.8)
  Top 0.305: E$43.P$2 v86.36,79.38 86.36,77.09 arc-90 85.85,76.58 71.5,76.58 arc90 70.93,76.01 70.93,60.71 arc-90 70.36,60.13 65.98,60.13 arc90 65.91,60.07
  Bottom 0.305: v86.36,79.38 E$43.P$2
S$69
  Top 0.406: 52.77,65.09 52.77,66.23 arc53 52.58,66.61 arc21 50.67,67.56 arc10 48.07,68.07 arc-82 46.1,70.17 46.1,72.71 arc90 44.96,73.98 30.61,73.98 arc-90 29.21,75.31 29.21,77.41
S$75  (via drill 0.9)
  Top 0.305: 65.85,58.55 v74.99,58.55 74.99,58.61
  Bottom 0.305: E$51.P$1 75.56,55.88 arc-90 74.93,56.52 74.93,58.48 arc-90 v74.99,58.55
S$78  (via drill 0.8)
  Top 0.305: v73.66,71.12 73.66,73.47
  Bottom 0.305: v73.66,71.12 73.6,71.12 73.6,68.64
S$80
  Top 0.305: 83.95,68.58 E$53.P$2
S$81
  Top 0.305: 81.34,63.75 81.34,63.69
S$83
  Top 0.305: JP1.8 93.03,64.83 86.87,64.83 arc90 86.3,64.26 86.3,54.23 arc-90 85.6,53.53 75.12,53.53 arc90 74.55,52.96 74.55,50.29 arc-90 73.98,49.72 65.98,49.72
S$87
  Top 0.305: E$67.P$2 5.08,4.32 arc90 5.65,3.75 9.59,3.75 arc90 10.16,4.32 E$68.P$2
S$88
  Top 0.305: JP1.12 92.96,59.69 89.41,59.69 arc90 88.9,59.18 88.9,53.34 arc-46 88.39,52.13 arc32 87.63,50.8 87.63,38.8 arc-90 87,38.16 80.58,38.16 arc90 80.52,38.1
S$89
  Top 0.305: JP2.28 23.56,40.64 arc-90 24.19,40.01 24.19,33.91 arc90 25.08,33.02 52.96,33.02 arc90 53.59,33.66 53.59,41.59
S$90
  Top 0.305: JP1.10 92.96,62.23 88.2,62.23 arc90 87.63,61.66 87.63,53.34 arc-53 87.12,52.32 arc53 86.36,50.8 86.36,41.27 arc-90 85.72,40.64 80.45,40.64
S$92
  Top 0.305: 75.82,39.37 arc-90 76.26,38.92 76.26,36.2 arc90 76.9,35.56 89.47,35.56 arc90 90.17,36.26 90.17,41.34 arc-90 90.74,41.91 92.96,41.91 JP1.26
  Top 0.406: 75.82,39.37 74.55,39.37
S$93
  Top 0.305: 74.49,41.91 76.39,41.91 arc-90 77.03,41.27 77.03,37.34 arc90 77.6,36.77 88.33,36.77 arc90 88.9,37.34 88.9,46.29 arc-90 89.6,46.99 92.96,46.99 JP1.22
  Route2 0.305: JP1.22 92.96,46.99 88.33,46.99 arc90 87.63,46.29 87.63,36.51 arc-90 86.87,35.75 70.36,35.75 arc-90 69.6,36.51 69.6,43.5 arc90 68.9,44.2 64.07,44.2 arc90 63.37,43.5 63.37,42.35 arc-90 62.74,41.72 51.31,41.72 arc-90 50.55,42.48 50.55,47.43 arc90 49.72,48.26 JP2.22
S$94
  Top 0.305: 80.52,39.37 78.3,39.37 arc-90 77.79,39.81 77.79,41.59 arc55 76.96,42.99 arc-44 76.26,44.39 76.26,47.5 arc90 75.69,48.13 65.98,48.13
S$95
  Top 0.305: 80.58,41.91 78.99,41.91 arc-90 78.49,42.42 arc57 78.04,43.24 arc-55 77.03,45.09 77.03,48.45 arc90 76.52,48.96 65.91,48.96
S$98
  Top 0.305: 74.55,43.18 70.93,43.18 arc-90 70.36,43.75 70.36,46.8 arc90 69.85,47.31 65.85,47.31
S$99
  Top 0.305: 74.49,40.64 70.17,40.64 arc-90 69.66,41.15 69.66,46.1 arc90 69.22,46.55 65.85,46.55
S$100  (via drill 0.6, 0.8)  (1 unrouted)
  Top 0.305: v83.82,43.18 80.58,43.18
  Route2 0.406: v83.82,43.18 83.82,48.9 arc90 83.19,49.53 69.28,49.53 arc-90 68.64,50.16 68.64,58.86 arc-47 69.47,60.77 arc46 70.48,63.06 70.48,72.96 arc90 69.79,73.66 v65.91,73.66
  Bottom 0.406: E$57.P$1 65.98,73.66
S$102
  Top 0.305: 65.85,45.72 68.52,45.72 arc-90 68.96,45.28 68.96,37.34 arc90 69.53,36.77 74.74,36.77 arc-90 75.31,36.2 75.31,34.86 arc90 75.88,34.29 95.89,34.29 arc90 96.58,34.99 96.58,39.94 arc90 95.89,40.64 JP1.28
S$103  (via drill 0.6)
  Top 0.305: 65.85,51.37 68.58,51.37 arc28 v69.85,51.69 | 80.64,44.45 v82.36,44.45 arc180 82.36,44.51
  Bottom 0.305: v69.85,51.69 69.85,43.24 arc90 70.55,42.55 81.92,42.55 arc90 82.36,42.99 v82.36,44.45
S$104
  Bottom 0.406: E$6.P$1 54.23,83.82 arc90 53.34,82.93 E$55.P$1
S$105
  Bottom 0.406: 53.34,81.22 55.82,81.22 arc90 E$56.P$2
S$106
  Bottom 0.406: E$55.P$2 55.75,78.74 arc90 55.82,78.8
S$107
  Bottom 0.406: 55.82,78.74 55.82,74.42 arc90 56.58,73.66 E$57.P$2
S$109
  Top 0.305: 21.08,21.53 21.08,29.21 JP2.36 54.36,30.48 arc90 55.12,31.24 55.12,41.59
S$110
  Top 0.305: 65.85,44.9 67.82,44.9 arc-90 68.26,44.45 68.26,36.51 arc90 69.15,35.62 73.34,35.62 arc-90 74.11,34.86 74.11,32.51 arc90 74.87,31.75 92.96,31.75 JP1.36 E$58.P$2
S$113
  Top 0.305: JP1.35 92.96,29.21 97.22,29.21 arc-90 97.79,28.64 97.79,27.24 arc90 98.36,26.67 E$32.P$2
S$114
  Top 0.305: E$27.P$2 E$32.P$1
S$115
  Top 0.305: E$33.P$2 E$27.P$1
S$116
  Top 0.305: JP2.35 16.13,30.48 arc90 15.24,29.59 E$29.P$2
S$117  (via drill 0.8)
  Top 0.305: v65.91,42.8 65.91,44.13 | E$27.P$3 99.06,18.35
  Route2 0.305: v65.91,42.8 65.91,35.24 arc90 66.74,34.42 71.94,34.42 arc-90 72.71,33.66 72.71,30.29 arc90 73.6,29.4 87.95,29.4 arc-90 88.84,28.51 88.84,21.21 arc90 89.72,20.32 E$27.P$3
S$120
  Top 0.305: 61.53,38.92 61.53,37.97 arc90 61.91,37.59 63.06,37.59 arc90 63.88,38.42
S$121
  Top 0.305: 62.48,38.92 62.36,41.66
S$122
  Top 0.305: 60.58,38.92 60.77,41.59
S$123
  Top 0.305: E$60.P$2 60.58,36.32
S$124
  Top 0.305: 59.05,38.86 59.12,41.66
S$125
  Top 0.305: E$26.P$2 E$29.P$1
S$126
  Top 0.305: 6.35,17.78 E$26.P$1
S$129
  Top 0.305: 48.39,52.96 42.99,52.96 arc90 42.29,52.26 42.29,47.88 arc-90 41.59,47.18 35.43,47.18 arc-90 34.73,47.88 34.73,57.66 arc90 34.04,58.36 33.47,58.36 arc-90 32.83,58.99 32.83,65.41 arc90 32.19,66.04 JP2.8
S$130
  Top 0.305: 54.36,41.59 54.36,32.51 arc-90 53.59,31.75 9.78,31.75 arc90 8.89,30.73 E$26.P$3 | 6.29,25.4 E$26.P$3 | E$26.P$3 8.89,25.46
S$131
  Top 0.305: 98.04,80.01 92.33,80.01 arc90 91.69,79.38 JP1.1
S$132
  Top 0.305: 97.98,79.31 94.87,79.31 arc90 94.23,78.68 JP1.2
S$136  (via drill 0.8)
  Top 0.305: 97.98,83.19 v100.33,83.19
S$137  (via drill 0.8)
  Top 0.305: 97.92,80.58 v100.33,80.58
S$138
  Top 0.305: 97.98,82.61 96.58,82.61 arc-90 96.14,83.06 96.14,83.69 arc90 95.63,84.14 92.84,84.14 arc-90 92.33,84.64 92.33,85.92 arc-90 92.39,85.98
S$139
  Top 0.305: 97.98,83.88 97.09,83.88 arc-90 96.71,84.26 96.71,85.53 arc90 96.27,85.98 E$63.P$1
S$140
  Top 0.305: 94.81,81.92 97.98,81.92
S$141
  Top 0.305: 97.98,81.28 96.71,81.28 arc44 96.08,81.03 arc-53 95.25,80.77 92.65,80.77 arc-90 92.27,81.15 E$62.P$1
S$144  (via drill 0.6)
  Top 0.305: 105.16,79.31 106.43,79.31 arc-90 107,78.74 107,77.22 arc-90 106.43,76.64 104.78,76.64 arc90 104.14,76.01 v104.14,73.66 | 65.85,52.96 67.31,52.96 arc46 68.64,53.53 arc-45 71.06,54.61 v71.12,54.61
  Route2 0.305: v104.14,73.66 104.14,55.37 arc-90 103.38,54.61 v71.12,54.61
S$145  (via drill 0.6)
  Top 0.305: 105.22,79.95 107.57,79.95 arc-90 108.08,79.44 108.08,76.01 arc-90 107.5,75.44 107.25,75.44 arc90 106.68,74.87 v106.68,73.66 | 65.85,52.13 67.31,52.13 arc31 68.01,52.32 arc-26 69.22,52.7 v71.12,52.7
  Route2 0.305: v106.68,73.66 106.68,52.96 arc-90 105.79,52.07 78.93,52.07 arc-17 77.66,52.26 arc15 75.06,52.7 v71.12,52.7
S$146  (via drill 0.9)  (1 unrouted)
  Bottom 0.305: E$73.P$1 26.54,88.14 arc-90 26.61,88.08 26.61,91.44
  other vias: 26.67,91.44
S$148  (via drill 0.6)
  Top 0.305: 105.22,81.28 108.65,81.28 arc-90 109.22,80.71 v109.22,73.66 | 65.85,50.55 69.85,50.55 arc23 v71.12,50.8
  Route2 0.305: v109.22,73.66 109.22,50.48 arc-90 108.27,49.53 88.9,49.53 arc-24 87.38,49.85 arc22 83.12,50.8 v71.12,50.8
S$150  (via drill 0.6)
  Top 0.305: v109.22,87.63 109.22,82.55 arc-90 108.58,81.92 105.22,81.92
  Route2 0.305: JP2.2 25.84,73.66 arc90 26.67,74.49 26.67,78.8 arc-90 27.43,79.57 41.21,79.57 arc90 42.04,80.26 42.04,89.92 arc-90 42.86,90.74 89.47,90.74 arc-90 90.04,90.04 90.04,88.33 arc90 90.68,87.63 v109.22,87.63
S$152  (via drill 0.6)
  Top 0.305: 105.16,82.55 107.06,82.55 arc90 107.63,83.12 v107.63,88.9
  Route2 0.305: JP2.1 19.81,74.61 arc-90 20.57,75.37 24.51,75.37 arc90 25.21,76.07 25.21,80.01 arc-90 26.04,80.83 38.04,80.83 arc90 38.92,81.72 38.92,91.31 arc-90 39.81,92.2 90.42,92.2 arc-90 91.25,91.38 91.25,89.6 arc90 92.01,88.9 v107.63,88.9
S$153  (via drill 0.6)  (1 unrouted)
  Top 0.305: 97.98,78.68 96.9,78.68 arc90 96.33,78.11 96.33,74.23 arc90 96.9,73.66 v101.6,73.66 | 65.79,57.72 69.98,57.72 arc-48 v71.12,57.09
  Route2 0.305: v101.6,73.66 101.6,57.91 arc-90 100.84,57.15 71.12,57.15
S$156
  Top 0.305: 16.7,82.49 14.1,82.49 arc-90 14.03,82.55
S$157
  Top 0.305: E$76.P$1 16.76,85.09
S$158
  Top 0.305: 16.7,87.5 14.03,87.5 arc-90 13.97,87.57
S$159
  Bottom 0.305: 13.97,87.57 13.91,87.57 arc-90 13.97,87.63 16.76,87.63 16.76,85.09 arc-90 16.7,85.03
S$161  (via drill 0.9)
  Top 0.305: 38.1,36.96 38.1,39.18 arc90 37.47,39.81 35.37,39.81 arc-90 34.86,40.32 34.86,40.7 arc90 34.29,41.27 30.92,41.27 arc-90 30.29,41.91 30.29,43.62 arc90 29.65,44.45 v10.16,44.45 7.94,44.45 arc-90 6.86,45.4 6.86,59.12 arc90 6.29,59.69 E$79.P$5
S$162  (via drill 0.8, 0.9)
  Top 0.305: v44.13,49.72 48.45,49.72
  Bottom 0.305: 24.13,88.08 E$75.P$1 19.3,78.17 arc-90 18.61,77.47 17.4,77.47 arc90 16.57,76.64 16.57,47.88 arc90 17.46,46.99 v25.4,46.99 25.91,46.99 arc-90 26.48,46.42 26.48,46.16 arc90 27.05,45.59 43.5,45.59 arc90 44.13,46.23 v44.13,49.72
S$163
  Top 0.305: 5.52,76.26 6.99,85.15
S$164  (via drill 0.9)
  Top 0.305: 22.29,50.8 24.89,50.8 arc-90 25.4,50.29 v25.4,49.53
S$165  (via drill 0.9)
  Top 0.305: 22.29,45.72 27.5,45.72 arc90 27.94,46.16 v27.94,46.99
S$166  (via drill 0.9)
  Top 0.305: v27.94,41.91 28.83,41.91 arc-90 29.46,41.27 29.46,37.72 arc90 30.23,36.96 33.02,36.96
S$167
  Top 0.305: JP2.10 31.11,63.5 arc-90 31.75,62.87 31.75,57.98 arc90 32.45,57.28 32.89,57.28 arc-90 33.59,56.58 33.59,47.18 arc90 34.35,46.42 38.54,46.42 arc-90 39.37,45.59 arc3 39.37,43.18
S$168
  Top 0.305: 48.39,48.13 44.07,48.13 arc90 43.43,47.5 43.43,46.99 arc-90 42.86,46.42 41.34,46.42 arc90 40.64,45.72 40.64,43.24
S$172
  Top 0.305: E$79.P$6 30.16,59.69 arc-90 30.73,59.12 30.73,56.83 arc90 31.24,56.33 31.81,56.33 arc-90 32.45,55.69 32.45,46.23 arc90 32.96,45.72 36.26,45.72 arc-90 36.83,45.15 36.83,43.18
S$173
  Top 0.305: E$79.P$8 30.67,54.61 arc-90 31.3,53.98 31.3,45.72 arc90 32,45.02 33.66,45.02 arc-90 34.29,44.39 34.29,43.18
S$174
  Top 0.305: E$79.P$2 16.45,64.77 arc-90 17.21,64.01 17.21,62.93 arc90 17.91,62.23 21.08,62.23 JP2.12
S$175
  Top 0.305: 38.1,43.12 38.1,41.78 arc90 38.61,41.27 43.75,41.27 arc90 44.26,41.78 44.26,46.04 arc-90 44.77,46.55 48.45,46.55
S$176
  Top 0.305: 35.56,43.18 35.56,41.21 arc90 36.2,40.58 44.32,40.58 arc90 45.02,41.27 45.02,45.21 arc-90 45.53,45.72 48.45,45.72
S$177  (via drill 0.9)
  Top 0.305: 51.12,41.59 51.12,39.43 arc-90 50.42,38.73 39.94,38.73 arc90 39.37,38.16 39.37,34.42 arc-90 38.73,33.78 25.65,33.78 arc-90 25.02,34.42 25.02,41.21 arc90 24.32,41.91 v10.16,41.91
S$178  (via drill 0.9)
  Top 0.305: 35.56,36.96 35.56,35.37 arc-90 34.99,34.8 34.29,34.8 | 34.29,34.8 28.51,34.8 arc-90 27.94,35.37 v27.94,36.83 | 34.29,34.8 34.29,36.96
S$180  (via drill 0.8, 0.9)  (1 unrouted)
  Top 0.305: JP2.26 25.27,43.18 arc-90 26.04,42.42 26.04,40.01 arc90 26.67,39.37 v27.94,39.37 | v48.32,42.74 48.32,44.13
  Route2 0.305: v27.94,39.37 28.77,39.37 arc-90 29.46,38.67 29.46,38.16 arc90 30.23,37.4 31.5,37.4 arc90 32.19,38.1 32.19,39.37 arc-90 32.89,40.07 47.62,40.07 arc90 48.32,40.77 48.32,42.8
S$184  (via drill 0.8, 0.9)  (1 unrouted)
  Top 0.305: v31.75,91.44 31.75,90.61 arc-90 31.11,89.98 25.08,89.98 arc90 24.32,89.22 24.32,86.11 arc-90 23.62,85.41 22.16,85.41 arc90 21.53,84.77 v21.53,82.49 19.37,82.49 | v45.72,51.37 48.39,51.37
  Bottom 0.305: 34.23,88.08 31.75,88.08 arc90 31.69,88.01 31.69,91.44 | v45.72,51.37 43.12,51.37 arc90 42.55,50.8 42.55,49.02 arc-90 41.85,48.32 28.51,48.32 arc-90 27.94,48.9 v27.94,49.53 27.94,51.31 arc90 27.18,52.07 18.41,52.07 arc-90 17.78,52.7 17.78,75.37 arc-90 18.61,76.2 20.83,76.2 arc90 21.53,76.9 v21.53,82.49
SWOUT
  Bottom 0.61: LM2676.P$4 73.66,20.7
  pour Bottom (isolate 0.406, no thermals): 72.9,19.05 74.55,19.05 74.55,33.66 73.91,34.29 45.21,34.29 45.21,25.4 71.63,25.4 72.9,24.13
V5  (via drill 0.8, 0.9, 1, 3.81)
  Top 0.305: E$68.P$1 v10.16,11.43 | v3.81,15.24 3.81,17.78 | v106.68,13.97 E$33.P$1
  Top 0.406: 50.8,18.67 49.02,18.67 arc-90 48.01,19.68 E$1.P$1 | v42.04,36.96 40.64,36.96 | 81.28,45.72 v81.28,48.26
  Top 0.61: E$1.P$1 44.45,21.59 arc-90 43.69,22.35 E$2.P$1 35.05,26.16 arc90 34.29,25.4 v34.29,23.75
  Bottom 0.305: E$74.P$2 v36.83,85.6 | v24.13,83.82 24.13,85.53 | 13.97,82.49 16.7,82.49 | 13.97,82.49 13.91,82.49 | v13.97,80.45 13.97,82.49 | 43.37,83.82 40.64,83.82 | 43.37,83.82 45.09,83.82 | v43.37,82.8 43.37,83.82 | E$86.P$1 v46.99,93.98 | 38.1,39.37 41.59,39.37 arc-90 42.04,38.92 v42.04,36.96
  Bottom 0.406: E$38.P$1 72.77,91.44 arc90 72.39,91.06 v72.39,88.9 v72.39,86.36 | E$39.P$1 82.93,91.44 arc90 82.55,91.06 v82.55,88.9 v82.55,86.36
  Bottom 0.61: 34.42,6.99 34.42,5.46 arc90 35.18,4.7 70.48,4.7 arc90 71.25,5.59 71.25,12.06 arc-90 71.88,12.7 LM2676.P$6
  other vias: 108.71,43.05
  pour Bottom (isolate 0.406, no thermals): 41.27,34.29 41.27,25.4 36.96,25.4 36.96,6.22 31.75,6.22 31.75,34.29
  pour Route14 (isolate 0.305, rank 2, no thermals): 1.33,100.27 15.24,100.27 15.24,90.68 23.88,90.68 23.88,100.27 90.17,100.27 90.17,90.68 98.74,90.68 98.74,100.27 112.97,100.27 112.97,1.33 98.81,1.33 98.81,10.92 90.17,10.92 90.17,1.33 23.88,1.33 23.88,10.92 15.24,10.92 15.24,1.33 1.33,1.33
V24
  pour Bottom (isolate 0.406, no thermals): 93.34,18.54 93.34,28.32 93.85,28.83 94.61,28.83 95.12,28.32 95.12,16.89 94.61,16.38 86.87,16.38 86.36,15.88 86.36,1.78 85.85,1.27 28.45,1.27 27.94,1.78 27.94,24 27.43,24.51 21.97,24.51 21.46,25.02 21.46,28.32 21.97,28.83 29.46,28.83 29.97,28.32 29.97,3.56 30.48,3.05 81.66,3.05 82.17,3.56 82.17,15.88 81.66,16.38 76.2,16.38 76.2,17.14 75.82,17.53 73.66,17.53 73.66,18.03 92.84,18.03
V25  (via drill 0.8, 1)
  Top 0.406: 48.39,56.13 49.72,56.13 arc74 50.74,56.9 arc-67 v51.94,57.91 | 55.94,41.66 55.94,42.86 arc64 55.63,43.37 arc8 54.36,43.88 arc-77 v53.47,45.21 | 65.85,56.13 64.64,56.13 arc-62 63.69,56.71 arc40 v62.36,57.91 | 59.12,65.09 59.12,63.82 arc62 59.69,62.87 arc-45 v60.9,61.4 arc-26 60.96,60.58 arc-44 v59.69,58.42 | 57.53,65.09 57.53,63.44 arc-74 v56.01,61.4
  Top 0.61: 34.23,14.86 30.92,14.86 arc-90 29.84,15.94 29.84,17.91 arc90 29.02,18.73 v25.53,18.73
  Route14 0.61: v54.61,48.26 51.24,48.26 arc90 50.61,47.62 50.61,44.45 arc-43 50.04,42.99 arc30 49.4,41.78 49.4,31.56 arc-90 48.45,30.61 31.88,30.61 arc90 30.92,29.65 30.92,19.62 arc-90 30.04,18.73 v25.53,18.73
  Bottom 0.406: v59.69,47.24 E$15.P$2 | v61.72,63.18 61.72,65.02
  pour Route14 (isolate 0.305, no thermals): 48.39,62.8 50.8,66.04 65.21,66.04 65.85,65.41 65.85,43.88 63.44,41.66 50.61,41.66 48.39,43.88
V33  (via drill 0.8, 1)  (1 unrouted)
  Top 0.305: v21.08,16.64 21.08,18.99 | 100.33,33.08 v100.33,35.56 | v99.06,13.97 E$34.P$1 | v3.81,22.86 E$31.P$1 | 62.55,36.32 E$59.P$2 | v102.87,80.58 105.22,80.58 | 105.22,83.88 106.36,83.88 arc90 106.68,84.2 106.68,85.28 arc90 106.24,85.72 v105.22,85.72 105.22,84.52 | 78.8,73.47 78.8,72.01 arc59 79.06,71.56 arc14 v80.07,71.12 80.07,73.34 | v72.39,61.91 72.39,63.5 | E$50.P$2 v81.85,55.88 | v83.95,75.25 E$53.P$1
  Top 0.406: E$59.P$2 v67.06,36.32 | E$19.P$3 34.29,82.04 arc90 33.78,82.55 v33.02,82.55 | 36.2,48.9 36.2,50.8 arc-53 v36.83,52.07 arc-53 37.47,50.8 37.47,48.96 | 48.39,53.78 49.66,53.78 arc-75 50.48,53.15 arc-2 50.8,51.88 arc79 51.88,51.05 | 58.36,41.66 58.36,42.86 arc-65 58.8,43.56 arc-13 60.13,44.01 arc96 v60.83,45.21 | 65.91,53.72 64.71,53.72 arc64 64.2,53.4 arc8 63.69,52.13 arc-67 v62.36,51.05
  Top 0.61: E$10.P$2 48.26,11.05 26.42,11.05 arc-90 25.53,11.94 v25.53,14.22
  Bottom 0.305: v105.22,85.72 102.93,85.72 arc90 102.87,85.66 | v81.85,55.88 E$50.P$2
  Bottom 0.406: E$37.P$1 v36.83,62.61 34.35,62.61 arc90 33.72,61.98 33.72,59.44 | v41.91,62.61 41.91,64.71 | v44.45,62.61 E$35.P$1 | E$116.P$1 v83.95,75.25
  other vias: 51.94,51.05
  pour Route3 (isolate 0.305): 1.27,100.33 15.24,100.33 15.24,90.68 23.88,90.68 23.88,100.33 90.17,100.33 90.17,90.68 98.81,90.68 98.81,100.33 113.03,100.33 113.03,1.27 98.81,1.27 98.81,10.92 90.17,10.92 90.17,1.27 23.88,1.27 23.88,10.92 15.24,10.92 15.24,1.27 1.27,1.27
(copper drawn outside any net)
  shapes: Bottom area x1, Bottom circle x1, Top circle x3

## Text on the board
tPlace: AZ CCW | COMMON | AZ CW | ENABLE | ENABLE | 5v | GND | 5v | GND | T4, T3 | T2, T1 | Az | El | RX | TX | 9 | 7 | G | 1 | RX | TX | GND | GND | GND | GND | CANL | CANH | 10 | 8 | 6 | 4 | 2 | CANL | CANH | GND | FLT | GND | OUT1 (FLT) | TSO | TSI | GND | DIR | GND | IN10 (DIR) | TSCK | TSS/ | GND | PLSE | GND | IN9 (PLSE) | GND | IN8 | GND | IN8 | GND | IN7 | GND | IN7 | GND | IN6 | GND | IN6 | GND | FWD | GND | IN2 (FWD) | GND | RST | GND | IN4 (RST) | GND | REV | GND | IN3 (REV) | GND | EN | GND | IN1 (EN) | GND | TEMP | GND | IN5 (TEMP) | 5V | /X | X | /X | X | (1A) | /B | B | /B | B | A | A | /A | /A | BRK | DMP OK | BRK | OK | GND | 24V | GND | 24V | GND | 24V | GND | 24V | V25 | 2006 May 08 (1.3) | V5 | V33 | ATA Drive Box Daughterboard